# Altium PCB Эквайлайзер0.1.PcbDoc
Units mm, origin at the board's own origin, x right, y up, seen from the top; angles counter-clockwise.
Board outline 34.68 x 32.33 mm, 2 copper layers (Top Layer, Bottom Layer); 19 components, 13 nets, 81 pads, 19 vias.
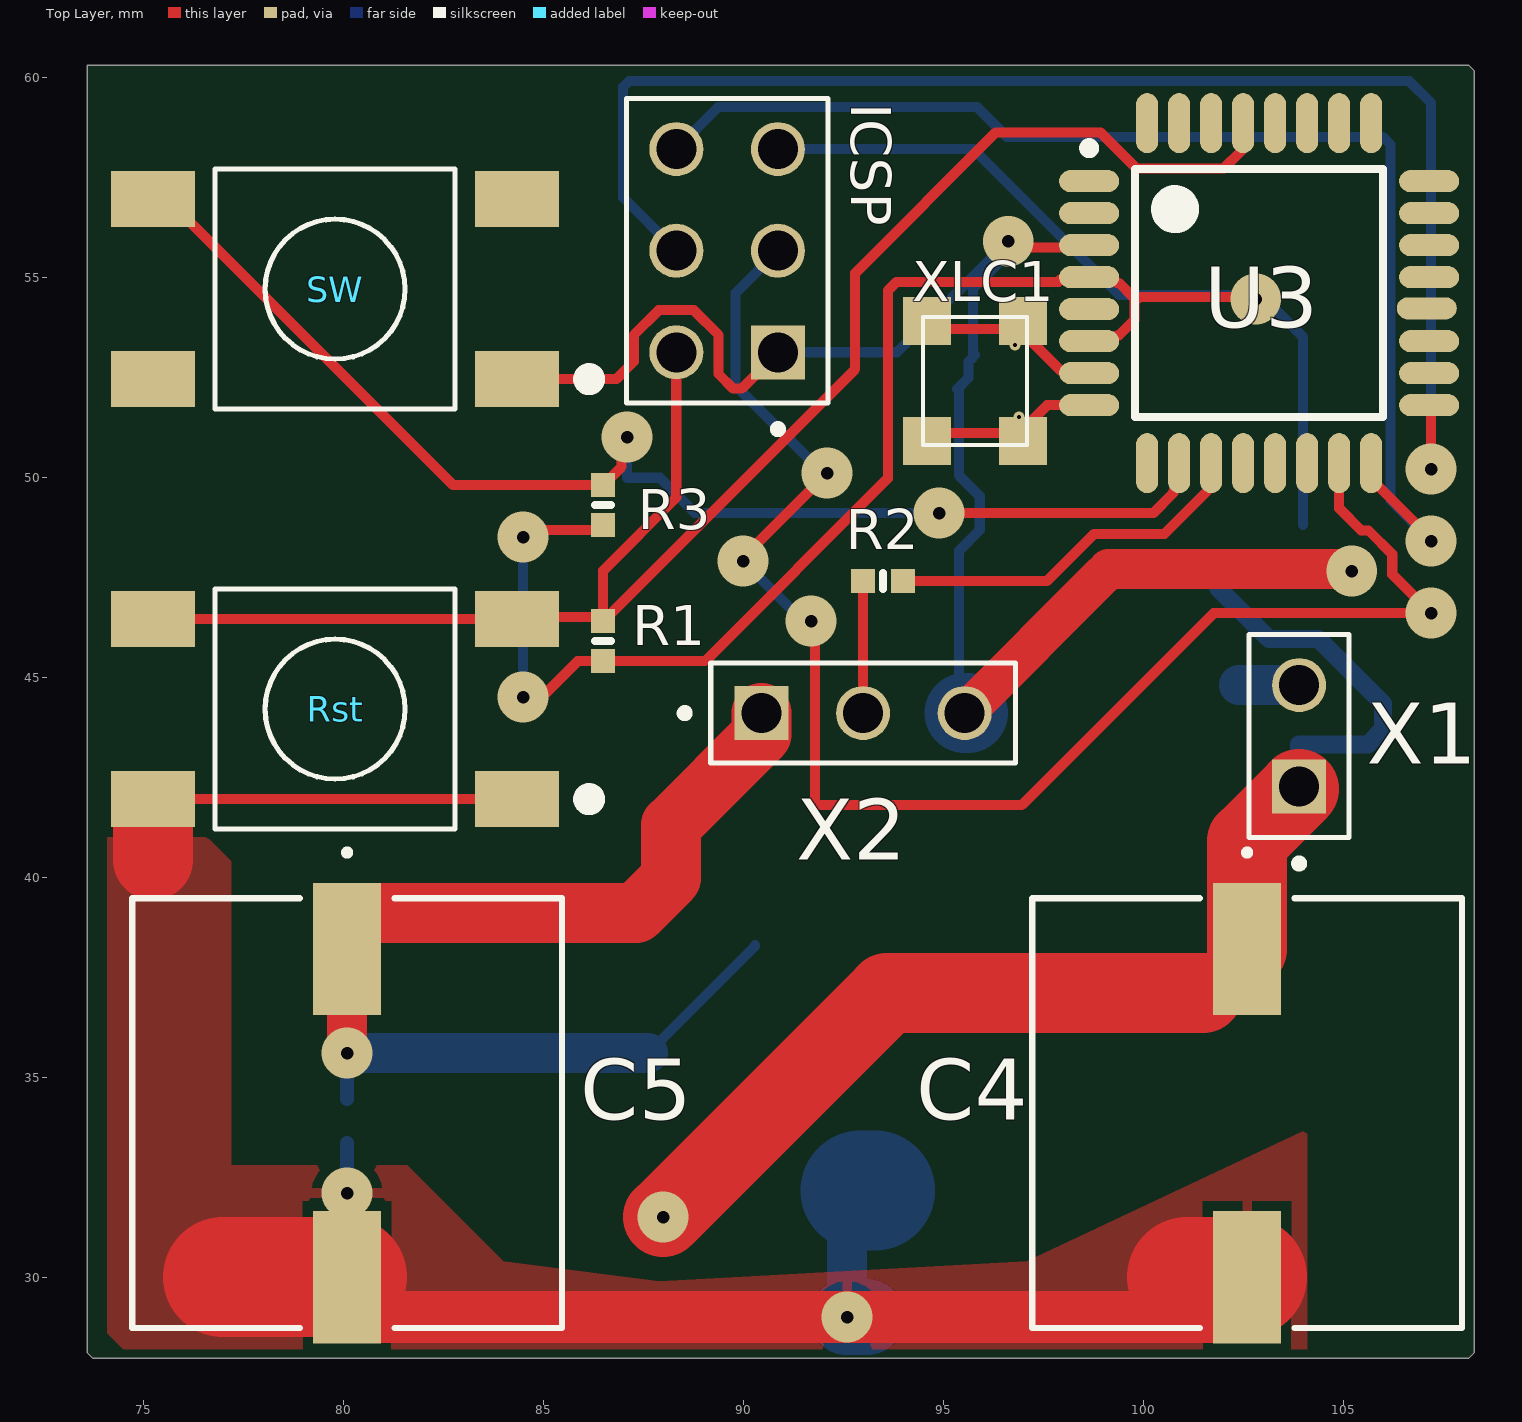
[diagram p0: Top Layer view]
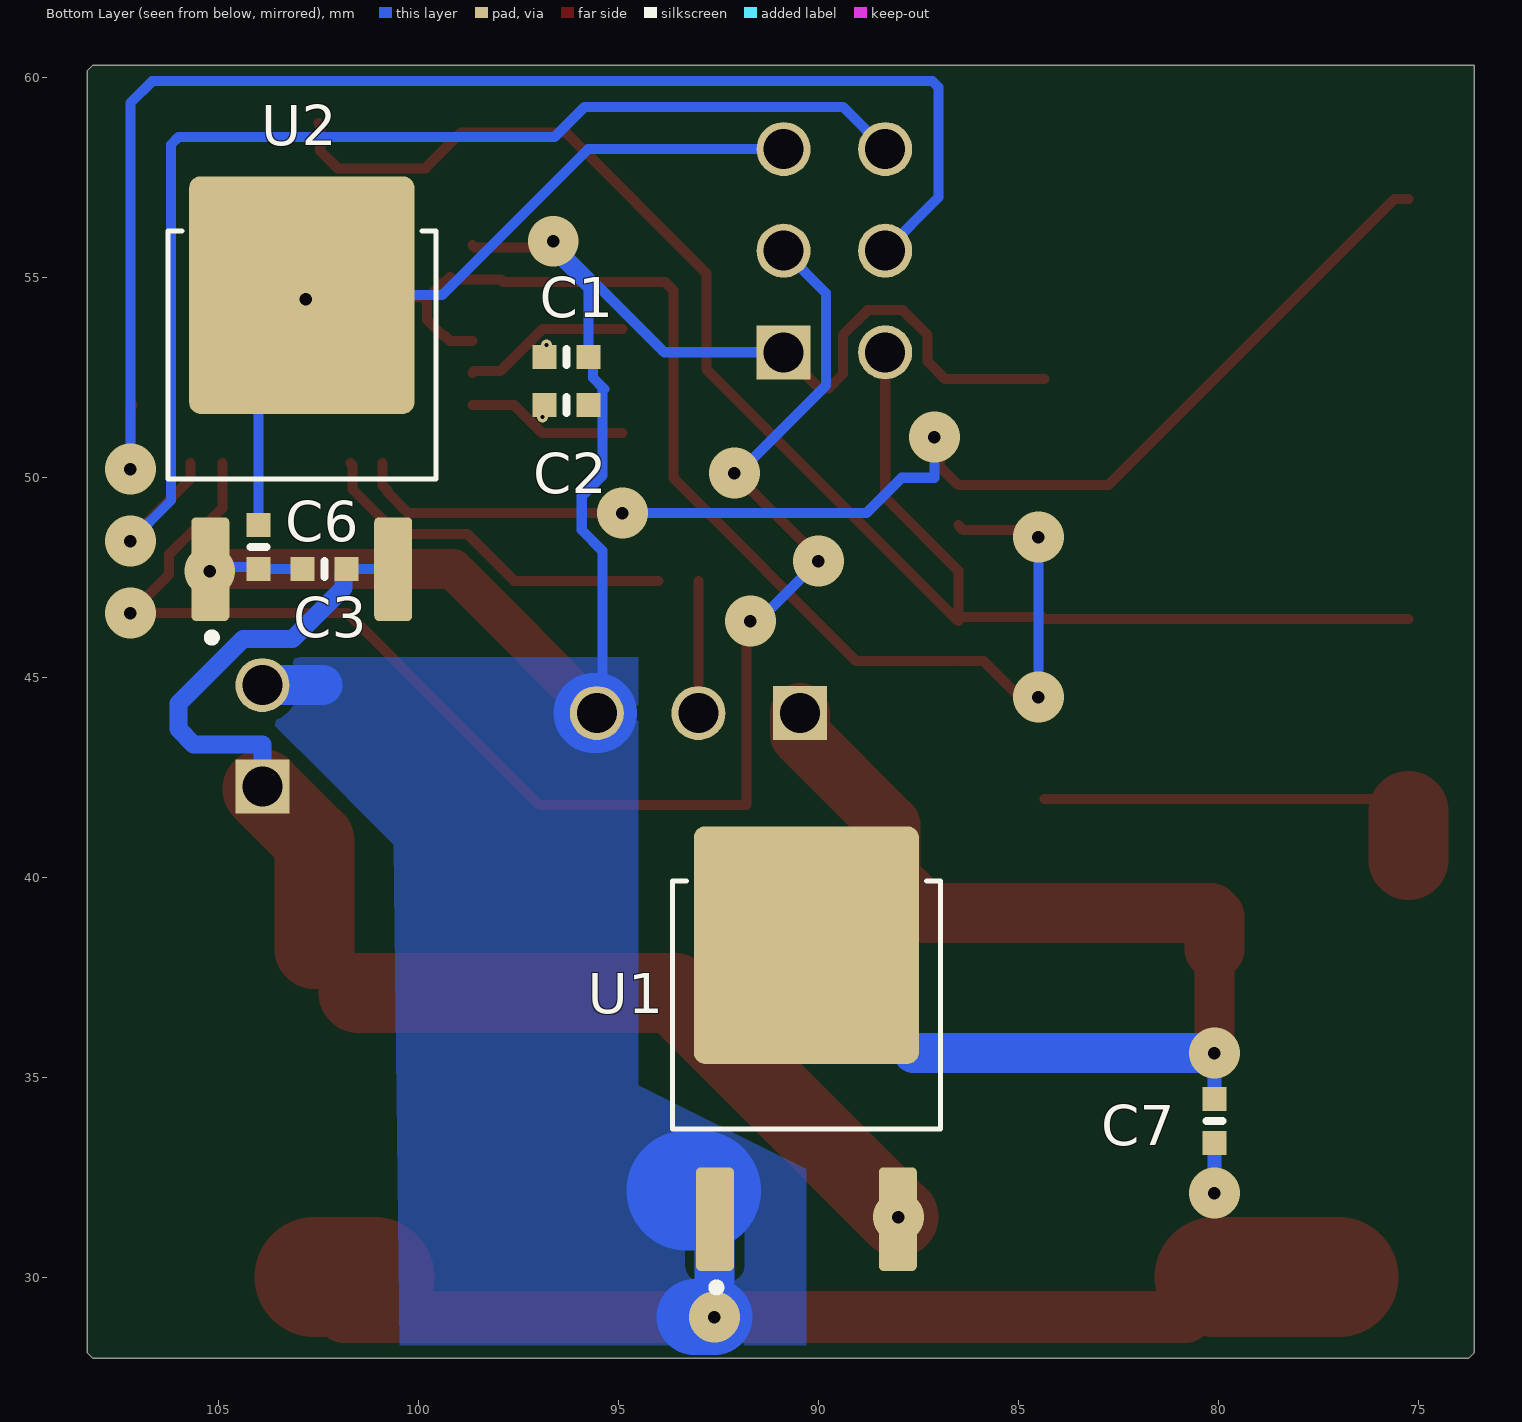
[diagram p1: Bottom Layer view, seen from below]

## Layer stack, top to bottom
Top Solder: solder mask 0.0102, Solder Resist, Dk 3.5
Top Layer: signal copper 0.0356
Dielectric 1: dielectric 0.32, FR-4, Dk 4.8
Bottom Layer: signal copper 0.0356
Bottom Solder: solder mask 0.0102, Solder Resist, Dk 3.5

## Board outline
73.6,28.115 73.749,27.966 108.132,27.966 108.281,28.115 108.281,60.151 108.132,60.3 73.6,60.3

## Design rules (kind name [scope] priority, off if disabled: settings)
Clearance [All] p1: gap=0.254 ignorepadtopadclearanceinfootprint=FALSE except(0: Arc-Hole Track-Hole SMDPad-Hole THPad-Hole Via-Hole Fill-Hole Poly-Hole Region-Hole Text-Hole)
PolygonConnect [All] p1: connectstyle=Relief reliefconductorwidth=0.254 reliefentries=4 polygonreliefangle="90 Angle" airgapwidth=0.254
RoomDefinition Принципиальная [InComponentClass('Принципиальная')] p1: confinementstyle=ConfineIn formatcopy=TRUE lockcomponents=FALSE outline 0,0 50.8,0 50.8,25.4 0,25.4
RoutingVias [All] p1: holewidth=0.711 width=1.27 viastyle="Through Hole" minholewidth=0.711 minwidth=1.27 maxholewidth=0.711 maxwidth=1.27
SolderMaskExpansion [All] p1: expansion=0.102 istentingtop=FALSE
Width [All] p1: maxlimit=0.254 minlimit=0.254 preferedwidth=0.254
30 further rules are at their usual default settings.

## Components (designator, comment, footprint, x,y, rotation, side; value= is the part's Value field where it differs from the comment)
C1 "Ceramic capacitor, 0.1μF, X7R, ±10%, 16V, 0402, -55...+125°C" "CAP: 0402" 96.3,53 r180 bottom value=0.1μF
C2 "Ceramic capacitor, 0.1μF, X7R, ±10%, 16V, 0402, -55...+125°C" "CAP: 0402" 96.3,51.8 r180 bottom value=0.1μF
C3 "Ceramic capacitor, 0.1μF, X7R, ±10%, 16V, 0402, -55...+125°C" "CAP: 0402" 102.35,47.7 r180 bottom value=0.1μF
C4 "Part Number: 35TZV330M10X10.5" CAP_J-V_10X10P00 102.6,34.1 r270 top value=Value
C5 "Part Number: 35TZV330M10X10.5" CAP_J-V_10X10P00 80.1,34.1 r270 top value=Value
C6 "Ceramic capacitor, 0.1μF, X7R, ±10%, 16V, 0402, -55...+125°C" "CAP: 0402" 104,48.25 r270 bottom value=0.1μF
C7 "Ceramic capacitor, 0.1μF, X7R, ±10%, 16V, 0402, -55...+125°C" "CAP: 0402" 80.1,33.9 r270 bottom value=0.1μF
ICSP "3х2" 3х2 90.869,53.12 r90 top
R1 "Resistor film, 10k, ±5%, 0402, 0.063W, -55...+125°C" "RES: 0402" 86.5,45.9 r270 top value=10k
R2 "Resistor film, 100R, ±5%, 0402, 0.063W, -55...+125°C" "RES: 0402" 93.5,47.4 r180 top value=100R
R3 "Resistor film, 100R, ±5%, 0402, 0.063W, -55...+125°C" "RES: 0402" 86.5,49.3 r270 top value=100R
Rst "RST" TE_4-1437565-9 79.8,44.2 r180 top
SW "4-1437565-9" TE_4-1437565-9 79.8,54.7 r180 top
U1 "AZ1117D-3.3TRE1" DPAK457P1010X238-3N 90.3,35.71 r180 bottom
U2 "AZ1117D-3.3TRE1" DPAK457P1010X238-3N 102.914,51.96 r180 bottom
U3 "ATMEGA328P-AU" TQFP80P900X900X120-32N 102.9,54.6 r0 top
X1 "2х1" 2х1 103.9,42.26 r90 top
X2 "3х1" 3х1 90.46,44.1 r0 top
XLC1 "SMD Crisstal 4" SMD4 95.8,52.4 r0 top

## Footprints (in the part's own frame and the unit in brackets; to place one, negate y for a bottom-side part, rotate by r counter-clockwise, add the part's x,y. Pads: shape width x height; smd on the part's side, far side on the other; paste and mask are expansions set on the pad)
2х1 [mm]
  rect 1.35x1.35 hole 1: 1(0,0)
  round 1.35 hole 1: 2(2.54,0)
  silkscreen extent -2.02,-1.25 3.81,1.25, body extent -1.27,-1.27 3.81,1.27, height 8.38
3х1 [mm]
  rect 1.35x1.35 hole 1: 1(0,0)
  round 1.35 hole 1: 2(2.54,0) 3(5.08,0)
  silkscreen extent -2.02,-1.25 6.35,1.25, body extent -1.27,-1.27 6.35,1.27, height 8.38
3х2 [mm]
  rect 1.35x1.35 hole 1: 1(0,0)
  round 1.35 hole 1: 2(2.54,0) 3(5.08,0) 4(0,2.54) 5(2.54,2.54) 6(5.08,2.54)
  silkscreen extent -2.02,-1.25 6.35,3.79, body extent -1.27,-1.27 6.35,3.81, height 8.38
"CAP: 0402" [mm]
  rect 0.6x0.6 smd: 1(-0.55,0) 2(0.55,0)
  silkscreen extent 0,-0.2 0,0.2, body extent -0.51,-0.25 0.51,0.25, height 0.51
CAP_J-V_10X10P00 [mil]
  rect 130x67 smd paste+0 mask+0: 1(-161.5,0) 2(161.5,0)
  silkscreen extent -259,-212 212,212, body extent -222,-200 222,206, height 425
DPAK457P1010X238-3N [mm]
  rrect25% 0.95x2.59 smd: 1(-2.286,-4.26) 3(2.286,-4.26)
  rrect10% 5.63x5.94 smd: 2(0,2.59)
  silkscreen extent -3.35,-6.07 3.35,4.19, body extent -3.28,-5.18 3.3,5.42, height 2.29
"RES: 0402" [mm]
  rect 0.6x0.6 smd: 1(-0.5,0) 2(0.5,0)
  silkscreen extent 0,-0.2 0,0.2, body extent -0.52,-0.25 0.47,0.25, height 0.34
SMD4 [mm]
  rect 1.2x1.2 smd paste+0 mask+0.003: 1(-1.2,1.5) 2(1.2,1.5) 3(-1.2,-1.5) 4(1.2,-1.5)
  silkscreen extent -1.3,-1.6 1.3,1.6, body extent -1.25,-1.6 1.25,1.6, height 0.95
TE_4-1437565-9 [mm]
  rect 2.1x1.4 smd: 1(-4.55,2.25) 2(4.55,2.25) 3(-4.55,-2.25) 4(4.55,-2.25)
  silkscreen extent -6.55,-3 3,3, body extent -5,-2.95 5,3.05, height 7.21
TQFP80P900X900X120-32N [mm] "TQFP, 32-Leads, Body 7.00x7.00mm, Pitch 0.80mm, IPC Medium Density"
  oval 1.5x0.55 smd: 1(-4.25,2.8) 2(-4.25,2) 3(-4.25,1.2) 4(-4.25,0.4) 5(-4.25,-0.4) 6(-4.25,-1.2) 7(-4.25,-2) 8(-4.25,-2.8) 17(4.25,-2.8) 18(4.25,-2) 19(4.25,-1.2) 20(4.191,-0.381) 21(4.25,0.4) 22(4.25,1.2) 23(4.25,2) 24(4.25,2.8)
  oval 0.55x1.5 smd: 9(-2.8,-4.25) 10(-2,-4.25) 11(-1.2,-4.25) 12(-0.4,-4.25) 13(0.4,-4.25) 14(1.2,-4.25) 15(2,-4.25) 16(2.8,-4.25) 25(2.8,4.25) 26(2,4.25) 27(1.2,4.25) 28(0.4,4.25) 29(-0.4,4.25) 30(-1.2,4.25) 31(-2,4.25) 32(-2.8,4.25)
  silkscreen extent -4.37,-3.1 3.1,3.75, body extent -4.44,-4.5 4.55,4.5, height 1.6

## Part data
C1 C2 C3 C6 C7: library part Ceramic_0402, Manufacturer=Yageo, Package=0402, PartNumber=CC0402KRX7R7BB104, Temperature=-55...+125°C, Tolerance=±10%, TypeCapacitor="Ceramic capacitor", TypeDielectric=X7R, Voltage=16V, HelpURL=https://www.digikey.com/product-detail/en/yageo/CC0402KRX7R7BB104/311-1338-1-ND/2103122, ValueManufacturerPartNumber="Ceramic capacitor, 0.1μF, X7R, ±10%, 16V, 0402, -55...+125°C"
C4 C5: library part 35TZV330M10X10.5, "No Description Available", Built_By=EMA_Cory, Copyright="Copyright (C) 2018 Accelerated Designs. All rights reserved", Manufacturer_Part_Number=35TZV330M10X10.5, RefDes=RefDes, Type=DEV, Vendor="Rubycon Netherlands"
ICSP X1 X2: "Board-To-Board Connector, Straight, AMPMODU Mod II Series, Through Hole, Header, 2, 2.54 mm", Package=None, Availability=Unavailable, Centerline_Pitch="2.54 mm[.1 in]", EU_RoHS_Compliance=Compliant, MF="TE Connectivity", MP=826926-2, Number_of_Positions=2, Price=None, Product_Type=Connector, SnapEDA_Link=https://www.snapeda.com/parts/826926-2/TE%20Connectivity%20AMP%20Connectors/view-part/554683/?ref=snap, TE_purchase_URL=https://www.te.com/usa-en/product-826926-2.html?te_bu=Cor&te_type=disp&te_campaign=seda_glo_cor-seda-global-disp-prtnr-fy19-seda-model-bom-cta_sma-317_1&elqCampaignId=32493
R1 R2 R3: library part Resistor_0402, Manufacturer=Yageo, Package=0402, PartNumber=RC0402JR-07100RL, Power=0.063W, Temperature=-55...+125°C, Tolerance=±5%, TypeResistor="Resistor film", HelpURL=https://www.digikey.com/product-detail/en/yageo/RC0402JR-07100RL/311-100JRCT-ND/729362
  R1: ValueManufacturerPartNumber="Resistor film, 10k, ±5%, 0402, 0.063W, -55...+125°C"
  R2 R3: ValueManufacturerPartNumber="Resistor film, 100R, ±5%, 0402, 0.063W, -55...+125°C"
Rst: library part 4-1437565-9, "Switch Tactile OFF _ON_ SPST Round Button Gull Wing 0.05A 12VDC 1.57N SMD Loose Piece", Contact_Current_Rating="50 mA", Package=None, Configuration_Pole-Throw="Single Pole - Single Throw", Digi-Key_Part_Number=450-1133-ND, Digi-Key_Purchase_URL=https://www.digikey.com/product-detail/en/te-connectivity-alcoswitch-switches/FSM6JSMA/450-1133-ND/525822?utm_source=snapeda&utm_medium=aggregator&utm_campaign=symbol, EU_RoHS_Compliance=Compliant, MF="TE Connectivity", MP=FSM6JSMA, SnapEDA_Link=https://www.snapeda.com/parts/FSM6JSMA/TE%20Connectivity%20ALCOSWITCH%20Switches/view-part/522766/?ref=snap, TE_purchase_URL=https://www.te.com/usa-en/product-4-1437565-9.html?te_bu=Cor&te_type=disp&te_campaign=seda_glo_cor-seda-global-disp-prtnr-fy19-seda-model-bom-cta_sma-317_1&elqCampaignId=32493
SW: "Switch Tactile OFF _ON_ SPST Round Button Gull Wing 0.05A 12VDC 1.57N SMD Loose Piece", Contact_Current_Rating="50 mA", Package=None, Configuration_Pole-Throw="Single Pole - Single Throw", Digi-Key_Part_Number=450-1133-ND, Digi-Key_Purchase_URL=https://www.digikey.com/product-detail/en/te-connectivity-alcoswitch-switches/FSM6JSMA/450-1133-ND/525822?utm_source=snapeda&utm_medium=aggregator&utm_campaign=symbol, EU_RoHS_Compliance=Compliant, MF="TE Connectivity", MP=FSM6JSMA, SnapEDA_Link=https://www.snapeda.com/parts/FSM6JSMA/TE%20Connectivity%20ALCOSWITCH%20Switches/view-part/522766/?ref=snap, TE_purchase_URL=https://www.te.com/usa-en/product-4-1437565-9.html?te_bu=Cor&te_type=disp&te_campaign=seda_glo_cor-seda-global-disp-prtnr-fy19-seda-model-bom-cta_sma-317_1&elqCampaignId=32493
U1 U2: "Linear Voltage Regulator IC 1 Output 1A TO-252-2", Package="TO-252-2 Diodes Inc.", Availability=Unavailable, MF="Diodes Inc.", MP=AZ1117D-3.3TRE1, Price=None, SnapEDA_Link=https://www.snapeda.com/parts/AZ1117D-3.3TRE1/Diodes%20Inc./view-part/856390/?ref=snap
U3: "Microchip Technology ATMEGA328P-AN, 8bit AVR Microcontroller, 20MHz, 32 kB Flash, 32-Pin TQFP"

## Via types
v1: diameter 1.27, hole 0.311, Top Layer to Bottom Layer, 17 vias
v2: diameter 0.27, hole 0.1, Top Layer to Bottom Layer, 2 vias

## Nets (pads, with @x,y where several pads share a name; then routed paths per layer and width w, separated by ;. In a path a pad name is that pad's centre, name@x,y a point inside that pad or via, vN(x,y) a via of type N, cw(c..) or ccw(c..) an arc to the next point about the centre after c; other vN are vias at no path point)
+5: C6.1 ICSP.3 R1.2 R3.2 U2.2 U3.4 U3.6 | length 53.3
  Top Layer w0.254: v1(84.5,44.5) 84.964,44.5 85.864,45.4 R1.2 ; v1(84.5,48.5) 84.675,48.675 86.375,48.675 R3.2 ; R1.2@86.6,45.4 89.05,45.4 93.619,49.969 93.619,54.658 93.842,54.881 97.878,54.881 97.941,54.943 99.148,54.943 99.205,55 99.349,54.856 99.397,54.856 99.753,54.5 ; U3.6 99.205,53.4 99.349,53.544 99.397,53.544 99.781,53.928 99.781,54.381 99.9,54.5 v1@102.8,54.5
  Bottom Layer w0.254: v1(84.5,44.5) v1(84.5,48.5) ; ICSP.3 95.76,58.2 99.41,54.55 U2.2 ; U2.2@102.9,54.6 104,53.5 C6.1
  other v1: 102.814,54.45
GND: C1.2 C2.2 C3.1 C4.2 C5.2 C6.2 C7.2 ICSP.1 Rst.1 Rst.2 SW.1 U1.1 U2.1 U3.3 X1.2 X2.3 | length 92.5
  Top Layer w0.254: 75.25,40.25 75.3,40.2 ; Rst.2 Rst.1 ; 77,30 77.002,29.998 ; v1(80.1,32.1) C5.2 80.1,29.724 C5.2@80.824,29 ; SW.1 86.827,52.45 87.273,52.896 87.273,53.557 87.892,54.176 88.767,54.176 89.385,53.557 89.385,52.579 89.752,52.213 89.962,52.213 ICSP.1 ; v1(96.626,55.897) 96.775,55.748 96.775,55.743 98.593,55.743 U3.3 ; 99.02,47.58 99.14,47.7 ; 101,29.9 101.098,29.998 ; C4.2@101.876,29 102.6,29.724 C4.2
  Top Layer w1: X2.3 99.02,47.58 ; 99.14,47.7 v1@105.2,47.7
  Top Layer w1.3: C5.2@80.824,29 v1(92.6,29) C4.2@101.876,29
  Top Layer w2: 75.25,40.429 Rst.2@75.25,41.65
  Top Layer w3: 77.002,29.998 C5.2 ; 101.098,29.998 C4.2
  Bottom Layer w0.254: ICSP.1 93.849,53.12 v1(96.626,55.897) 96.626,55.597 95.75,54.721 95.75,53.1 C1.2@95.8,53.05 ; U1.1@92.6,31.436 U1.1 92.586,31.82 U1.1@92.934,32.168 ; 95.35,52.2 95.635,52.485 95.635,52.885 C1.2 ; 95.4,52.15 95.4,50.037 95.916,49.521 95.916,48.679 95.4,48.163 95.4,44.24 X2.3 ; C3.1 C6.2 104.05,47.75 U2.1@105.186,47.75
  Bottom Layer w0.354: v1(80.1,32.1) C7.2
  Bottom Layer w1: v1(92.6,29) U1.1@92.6,31.436 ; 102.4,44.8 X1.2
  Bottom Layer w1.9: v1(92.6,29) v1@93.1,29
  Bottom Layer w2: X2.3 X2.3@95.624,44.1
  Bottom Layer w3: U1.1@92.934,32.168 93.293,32.168
  other v1: 105.214,47.65
NetC1_1: C1.1 U3.7 XLC1.1 XLC1.2 | length 4.2
  Top Layer w0.254: XLC1.1@94.9,53.7 96.9,53.7 97.943,52.657 98.593,52.657 U3.7
  other v2: 96.8,53.3
NetC2_1: C2.1 U3.8 XLC1.3 XLC1.4 | length 4
  Top Layer w0.254: XLC1.3@94.9,51.1 96.9,51.1 97.6,51.8 U3.8
  other v2: 96.9,51.5
NetC3_2: C3.2 C4.1 U1.3 U2.3 X1.1 | length 33.1
  Top Layer w0.254: C4.1@101.876,37.119 102.6,37.843 C4.1
  Top Layer w1: 101.498,37.1 101.517,37.119 C4.1@101.876,37.119
  Top Layer w2: v1(88,31.5) 93.6,37.1 101.498,37.1 ; C4.1 102.6,40.9 X1.1@103.9,42.2
  Bottom Layer w0.254: U2.3@100.614,47.75 100.664,47.7 C3.2
  Bottom Layer w0.454: C3.2 101.873,47.627 101.873,47.227 103.144,45.956 104.379,45.956 106,44.335 106,43.7 105.616,43.316 103.9,43.316 X1.1
NetC5_1: C5.1 C7.1 U1.2 X2.1 | length 29.4
  Top Layer w1: v1(80.1,35.6) C5.1
  Top Layer w1.5: C5.1 80.1,38.999 80.201,39.1 87.321,39.1 88.2,39.979 88.2,41.3 90.46,43.56 X2.1
  Bottom Layer w0.254: U1.2@87.624,35.6 90.3,38.276 U1.2
  Bottom Layer w0.354: C7.1 v1(80.1,35.6)
  Bottom Layer w1: v1(80.1,35.6) U1.2@87.624,35.6
NetICSP_2: ICSP.2 U3.15 | length 39.2
  Top Layer w0.254: v1(90,47.9) 90,48 v1(92.1,50.1) ; v1(91.7,46.4) 91.8,46.3 91.8,41.8 96.963,41.8 101.763,46.6 v1(107.2,46.6) 106.23,47.57 106.23,48.071 105.635,48.666 105.453,48.666 104.9,49.219 U3.15
  Bottom Layer w0.254: v1(90,47.9) 91.5,46.4 v1(91.7,46.4) ; ICSP.2 89.813,54.604 89.813,52.287 92,50.1 v1(92.1,50.1)
NetICSP_4: ICSP.4 R1.1 Rst.3 Rst.4 U3.29 | length 42.4
  Top Layer w0.254: Rst.4 Rst.3 84.4,46.5 R1.1@86.5,46.5 ; ICSP.4 88.329,49.49 86.5,47.661 R1.1@86.5,46.5 ; U3.29 102.452,58.802 102.452,58.152 102.019,57.719 99.828,57.719 98.929,58.618 96.318,58.618 92.8,55.1 92.8,52.7 R1.1 R1.1@86.5,46.5
NetICSP_5: ICSP.5 U3.17 | length 35.9
  Top Layer w0.254: U3.17 107.2,51.75 v1(107.2,50.2)
  Bottom Layer w0.254: ICSP.5 87,56.989 87,59.751 87.149,59.9 106.651,59.9 107.2,59.351 v1(107.2,50.2)
NetICSP_6: ICSP.6 U3.16 | length 31.6
  Top Layer w0.254: U3.16 105.7,49.955 107.2,48.455 v1(107.2,48.4)
  Bottom Layer w0.254: ICSP.6 89.385,59.256 95.844,59.256 96.6,58.5 106,58.5 106.184,58.316 106.184,49.416 v1(107.2,48.4)
NetR2_1: R2.1 U3.11 | length 9.3
  Top Layer w0.254: R2.1 97.594,47.4 98.775,48.581 100.534,48.581 101.643,49.691 101.643,50.293 U3.11
NetR2_2: R2.2 X2.2 | length 3.3
  Top Layer w0.254: X2.2 R2.2
NetR3_1: R3.1 SW.4 U3.10 | length 31.7
  Top Layer w0.254: SW.4 75.6,56.95 82.75,49.8 R3.1 86.963,50.263 86.963,50.863 v1(87.1,51) ; v1(94.9,49.1) 100.253,49.1 100.756,49.603 100.756,49.651 100.9,49.795 U3.10
  Bottom Layer w0.254: v1(87.1,51) 87.1,49.984 87.916,49.984 88.8,49.1 v1(94.9,49.1)
pads on no net: SW.2 SW.3 U3.1 U3.2 U3.5 U3.9 U3.12 U3.13 U3.14 U3.18 U3.19 U3.20 U3.21 U3.22 U3.23 U3.24 U3.25 U3.26 U3.27 U3.28 U3.30 U3.31 U3.32

## Polygon pours and split planes (outlines as drawn)
GND on Top Layer "GND_L01_P000" (solid, pour order 0): 104.1,28.2 104.1,33.7 97.087,30.4 87.9,29.9 84,30.4 81.6,32.8 77.2,32.8 77.2,40.4 76.1,41.5 75.9,41.3 74.1,41.3 74.1,28.6 74.5,28.2
GND on Bottom Layer (solid, pour order 3): 100.615,40.815 104.5,44.7 104.5,45 104,45.5 94.5,45.5 94.5,34.8 90.3,32.7 90.3,28.3 100.462,28.3

## Text inside footprints (layer, text, board x,y; h text height)
C4: Mechanical 7 "Default Padstyle: RX130Y67D0T" at 91.386,43.307 h1.27 r270; Mechanical 7 "Alternate 1 Padstyle: OX60Y90D30P" at 88.846,44.577 h1.27 r270; Mechanical 7 "Alternate 2 Padstyle: OX90Y60D30P" at 86.306,44.577 h1.27 r270; Mechanical 7 "0.043in/1.092mm" at 102.283,25.299 h0.64 r270; Mechanical 7 "0.429in/10.897mm" at 110.893,36.64 h0.64 r270; Mechanical 7 "0.413in/10.49mm" at 102.283,47.156 h0.64 r270; Mechanical 7 "0.126in/3.2mm" at 93.672,40.012 h0.64 r270; Mechanical 7 "0.413in/10.49mm" at 91.132,36.481 h0.64 r270
C5: Mechanical 7 "Default Padstyle: RX130Y67D0T" at 68.886,43.307 h1.27 r270; Mechanical 7 "Alternate 1 Padstyle: OX60Y90D30P" at 66.346,44.577 h1.27 r270; Mechanical 7 "Alternate 2 Padstyle: OX90Y60D30P" at 63.806,44.577 h1.27 r270; Mechanical 7 "0.043in/1.092mm" at 79.782,25.299 h0.64 r270; Mechanical 7 "0.429in/10.897mm" at 88.393,36.64 h0.64 r270; Mechanical 7 "0.413in/10.49mm" at 79.782,47.156 h0.64 r270; Mechanical 7 "0.126in/3.2mm" at 71.172,40.012 h0.64 r270; Mechanical 7 "0.413in/10.49mm" at 68.632,36.481 h0.64 r270